# Altium PCB POT 2x8.PcbDoc
Units mil, origin at the board's own origin, x right, y up, seen from the top; angles counter-clockwise.
Board outline 6000 x 4000 mil, 4 copper layers (Top Layer, Mid Layer 1, Mid Layer 2, Bottom Layer), stack 38.189 mil thick; 76 components, 83 nets, 369 pads, 21 vias.
Unrouted connection lines stored in the file: 226.
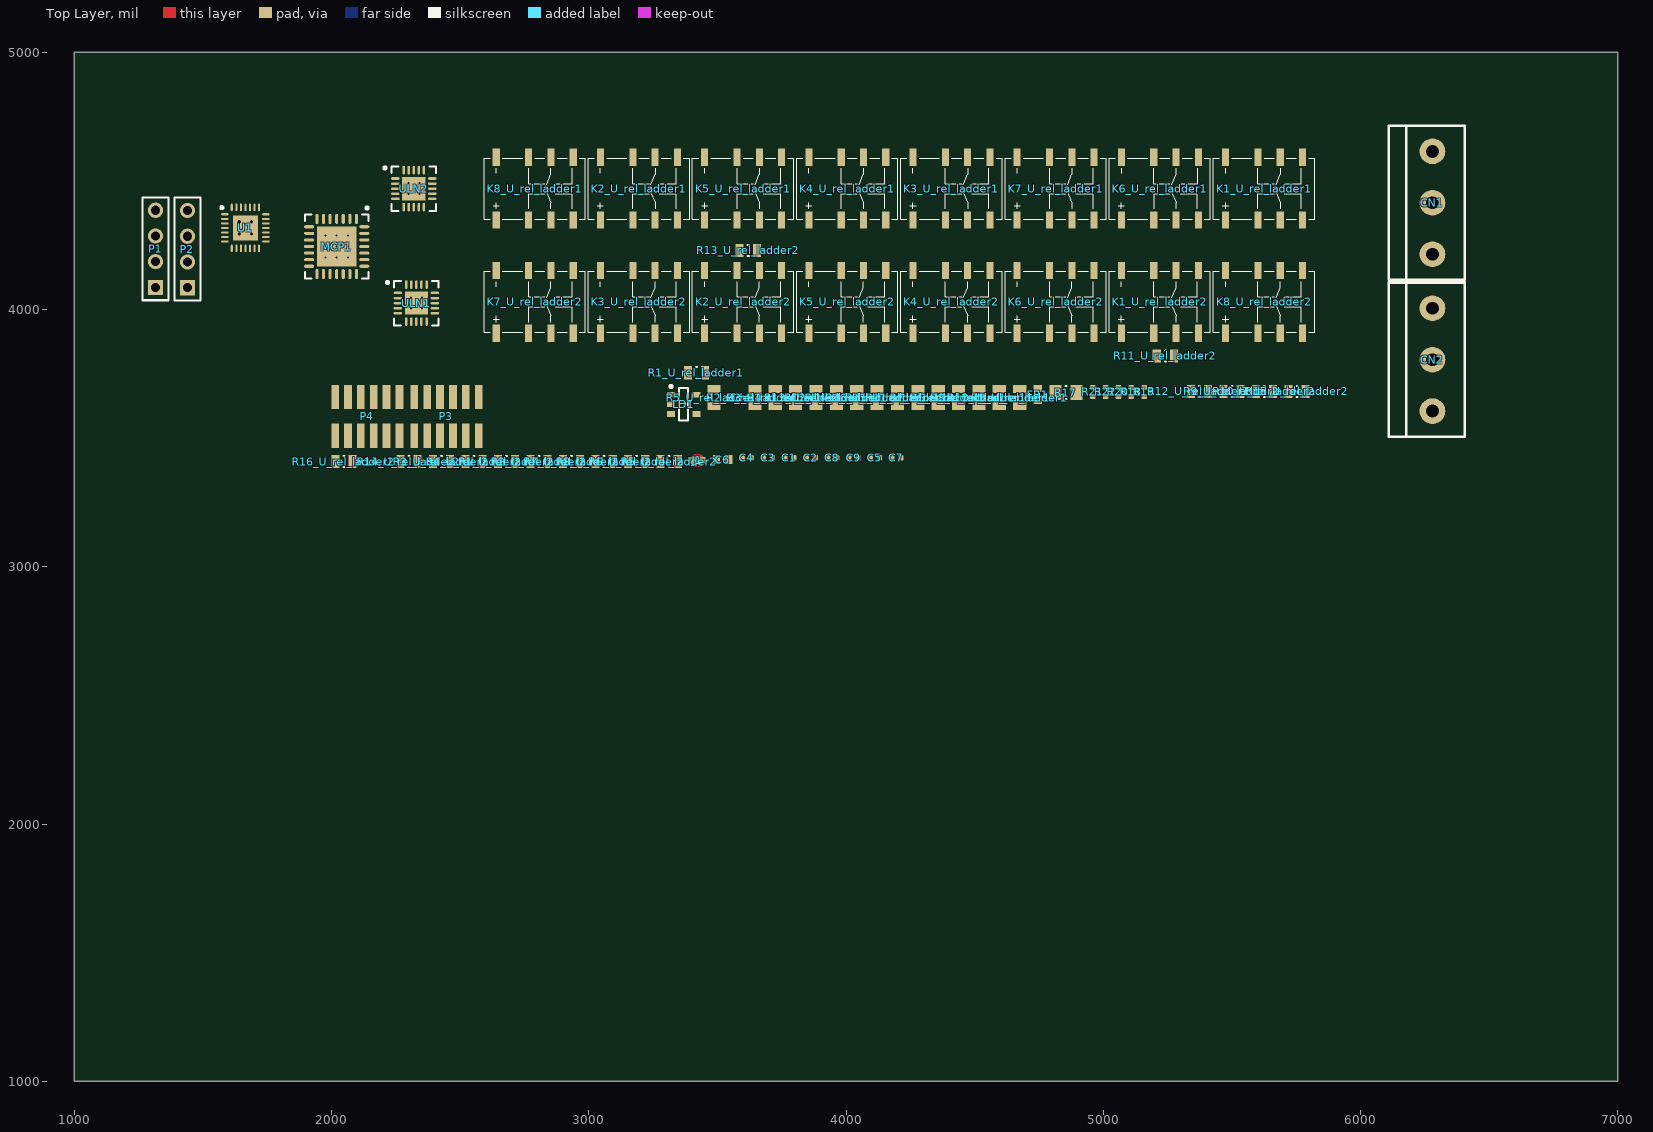
[diagram p0: Top Layer view]
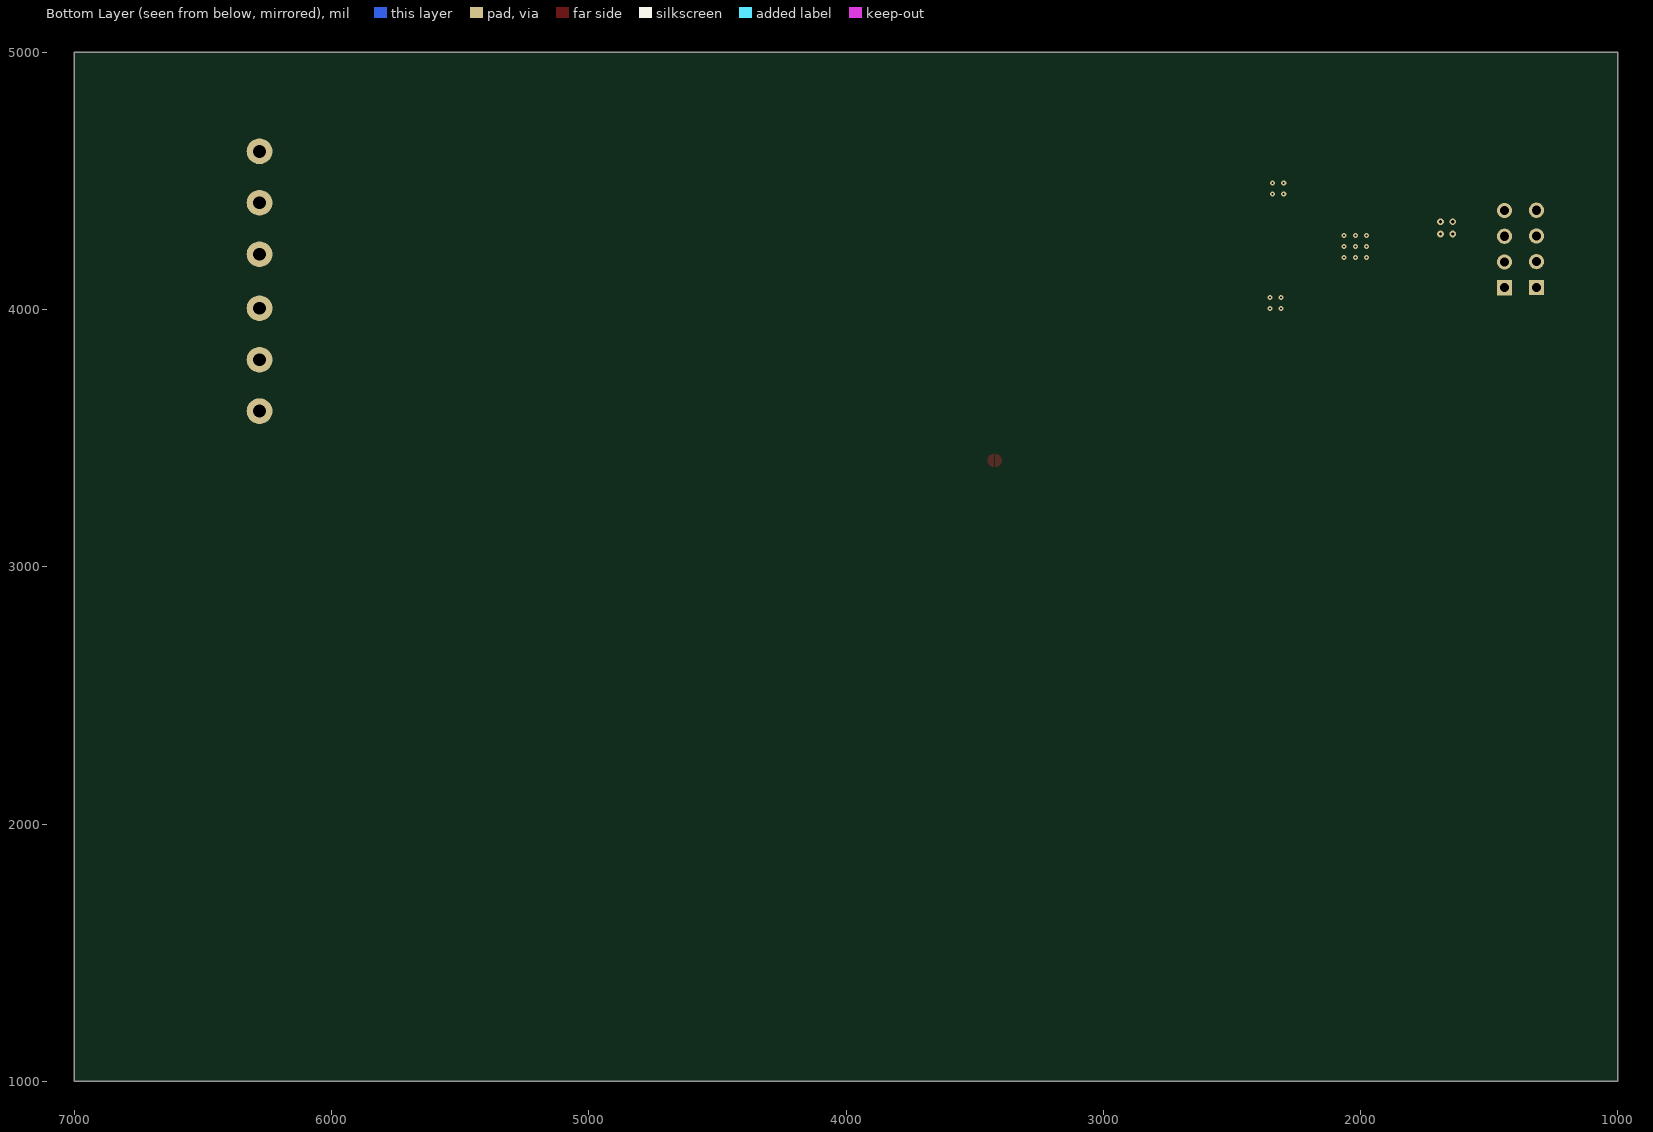
[diagram p1: Bottom Layer view, seen from below]

## Layer stack, top to bottom
Top Solder: solder mask 0.5, Solder Resist, Dk 3.8
Top Layer: signal copper 1.378
Dielectric 1: prepreg 3.937, 2313, Dk 4.05
Mid Layer 1: signal copper 0.689
Core: core 26.1811, FR-4, Dk 4.5
Mid Layer 2: signal copper 0.689
Dielectric 2: prepreg 3.937, 2313, Dk 4.05
Bottom Layer: signal copper 1.378
Bottom Solder: solder mask 0.5, Solder Resist, Dk 3.8

## Board outline
1000,1000 7000,1000 7000,5000 1000,5000

## Design rules (kind name [scope] priority, off if disabled: settings)
BoardOutlineClearance [All] p1: gap=7.87 ignorepadtopadclearanceinfootprint=FALSE
Clearance [All] p1: gap=4 ignorepadtopadclearanceinfootprint=FALSE except(5: Arc-Via Track-Via SMDPad-Via THPad-Via Via-Via Via-Fill Via-Poly Via-Region Via-Text; 9.84: Arc-Hole Track-Hole SMDPad-Hole THPad-Hole Via-Hole Fill-Hole Poly-Hole Region-Hole Text-Hole)
ComponentClearance [All] p1: gap=4 collisioncheckmode=3 verticalgap=4 showdistances=TRUE
DiffPairsRouting [All] p1: maxlimit=4 minlimit=4 mostfreqgap=4 toplayer_minwidth=4 toplayer_maxwidth=71497.94 toplayer_prefwidth=4 midlayer1_minwidth=4 midlayer1_maxwidth=71497.94 midlayer1_prefwidth=4 midlayer2_minwidth=4 midlayer2_maxwidth=71497.94 midlayer2_prefwidth=4 bottomlayer_minwidth=4 bottomlayer_maxwidth=71497.94 bottomlayer_prefwidth=4 maxuncoupledlength=500
Height [All] p1: minheight=0 maxheight=71497.94 prefheight=500
HoleSize [All] p1: absolutevalues=TRUE maxlimit=248.03 minlimit=7.87 maxpercent=80.000 minpercent=20.000
HoleToHoleClearance [All] p1: gap=9.84 allowstackedmicrovias=FALSE
MinimumAnnularRing [All] p1: minimumring=3
MinimumSolderMaskSliver [All] p1: minsoldermaskwidth=0
PlaneClearance [All] p1: clearance=4
PlaneConnect PlaneConnectPowerPads [InPadClass('PowerPads')] p1: planeconnectstyle=Direct reliefexpansion=20 reliefentries=4 reliefconductorwidth=10 reliefairgap=10
PlaneConnect [All] p2: pad.planeconnectstyle=Relief pad.reliefexpansion=11.81 pad.reliefentries=4 pad.reliefconductorwidth=4 pad.reliefairgap=4 via.planeconnectstyle=Direct via.reliefexpansion=11.81 via.reliefentries=4 via.reliefconductorwidth=5 via.reliefairgap=5
PolygonConnect PolygonConnectPowerPads [All vs (InPadClass('PowerPads'))] p1: connectstyle=Direct reliefconductorwidth=10 reliefentries=4 polygonreliefangle="90 Angle" airgapwidth=10
PolygonConnect [All] p2: thpad.connectstyle=Relief thpad.reliefconductorwidth=4 thpad.reliefentries=4 thpad.polygonreliefangle="90 Angle" thpad.airgapwidth=4 smdpad.connectstyle=Relief smdpad.reliefconductorwidth=4 smdpad.reliefentries=4 smdpad.polygonreliefangle="90 Angle" smdpad.airgapwidth=4 via.connectstyle=Direct via.reliefconductorwidth=5 via.reliefentries=4 via.polygonreliefangle="90 Angle" via.airgapwidth=5
RoutingVias [All] p1: holewidth=7.87 width=17.72 viastyle="Through Hole" minholewidth=7.87 minwidth=17.72 maxholewidth=248.03 maxwidth=257.87
SilkToSilkClearance [All] p1: silktosilkclearance=0
SilkToSolderMaskClearance [IsPad] p1: minsilkscreentomaskgap=4 clearancetoexposedcopper=TRUE
SolderMaskExpansion [All] p1: expansion=2.95 istentingtop=FALSE
Width [All] p1: maxlimit=71497.94 minlimit=4 preferedwidth=4
20 further rules are at their usual default settings.

## Classes and differential pairs
channel class rel_ladder: U_rel_ladder1 U_rel_ladder2
component class U_rel_ladder2: K1_U_rel_ladder2 K2_U_rel_ladder2 K3_U_rel_ladder2 K4_U_rel_ladder2 K5_U_rel_ladder2 K6_U_rel_ladder2 K7_U_rel_ladder2 K8_U_rel_ladder2 R1_U_rel_ladder2 R2_U_rel_ladder2 R3_U_rel_ladder2 R4_U_rel_ladder2 R5_U_rel_ladder2 R6_U_rel_ladder2 R7_U_rel_ladder2 R8_U_rel_ladder2 R9_U_rel_ladder2 R10_U_rel_ladder2 R11_U_rel_ladder2 R12_U_rel_ladder2 R13_U_rel_ladder2 R14_U_rel_ladder2 R15_U_rel_ladder2 R16_U_rel_ladder2
component class U_rel_ladder1: K1_U_rel_ladder1 K2_U_rel_ladder1 K3_U_rel_ladder1 K4_U_rel_ladder1 K5_U_rel_ladder1 K6_U_rel_ladder1 K7_U_rel_ladder1 K8_U_rel_ladder1 R1_U_rel_ladder1 R2_U_rel_ladder1 R3_U_rel_ladder1 R4_U_rel_ladder1 R5_U_rel_ladder1 R6_U_rel_ladder1 R7_U_rel_ladder1 R8_U_rel_ladder1 R9_U_rel_ladder1 R10_U_rel_ladder1 R11_U_rel_ladder1 R12_U_rel_ladder1 R13_U_rel_ladder1 R14_U_rel_ladder1 R15_U_rel_ladder1 R16_U_rel_ladder1
component class "POT 2x8": C1 C2 C3 C4 C5 C6 C7 C8 C9 CN1 CN2 FB1 J1 LD1 MCP1 P1 P2 P3 P4 R17 R18 R19 R20 R21 R22 U1 ULN1 ULN2

## Components (designator, comment, footprint, x,y, rotation, side; value= is the part's Value field where it differs from the comment)
C1 "100n" R1005_0402i_L 3780.06,3423.46 r0 top
C2 "100n" R1005_0402i_L 3863.18,3423.46 r0 top
C3 "100n" R1005_0402i_L 3696.94,3423.46 r0 top
C4 "100n" R1005_0402i_L 3613.83,3423.46 r0 top
C5 "100n" R1005_0402i_L 4112.53,3423.46 r0 top
C6 "1u" C1608_0603I_L 3520.47,3416.77 r0 top
C7 "100n" R1005_0402i_L 4195.65,3423.46 r0 top
C8 "100n" R1005_0402i_L 3946.3,3423.46 r0 top
C9 "100n" R1005_0402i_L 4029.42,3423.46 r0 top
CN1 "VRSTNA SPONKA 3P/16A" "VRSTNA SPONKA 3P/16A" 6280,4615 r270 top
CN2 "VRSTNA SPONKA 3P/16A" "VRSTNA SPONKA 3P/16A" 6280,4005 r270 top
FB1 "FERITTE BEAD" R1608_0603I_L 4745.52,3669.57 r90 top
J1 "Terminator" solderJumper 3422.18,3413.49 r0 top
K1_U_rel_ladder1 "DPDT" "AXICOM IM-G Relay" 5625,4470 r0 top (schematic designator K1)
K1_U_rel_ladder2 "DPDT" "AXICOM IM-G Relay" 5220,4030 r0 top (schematic designator K1)
K2_U_rel_ladder1 "DPDT" "AXICOM IM-G Relay" 3195,4470 r0 top (schematic designator K2)
K2_U_rel_ladder2 "DPDT" "AXICOM IM-G Relay" 3600,4030 r0 top (schematic designator K2)
K3_U_rel_ladder1 "DPDT" "AXICOM IM-G Relay" 4410,4470 r0 top (schematic designator K3)
K3_U_rel_ladder2 "DPDT" "AXICOM IM-G Relay" 3195,4030 r0 top (schematic designator K3)
K4_U_rel_ladder1 "DPDT" "AXICOM IM-G Relay" 4005,4470 r0 top (schematic designator K4)
K4_U_rel_ladder2 "DPDT" "AXICOM IM-G Relay" 4410,4030 r0 top (schematic designator K4)
K5_U_rel_ladder1 "DPDT" "AXICOM IM-G Relay" 3600,4470 r0 top (schematic designator K5)
K5_U_rel_ladder2 "DPDT" "AXICOM IM-G Relay" 4005,4030 r0 top (schematic designator K5)
K6_U_rel_ladder1 "DPDT" "AXICOM IM-G Relay" 5220,4470 r0 top (schematic designator K6)
K6_U_rel_ladder2 "DPDT" "AXICOM IM-G Relay" 4815,4030 r0 top (schematic designator K6)
K7_U_rel_ladder1 "DPDT" "AXICOM IM-G Relay" 4815,4470 r0 top (schematic designator K7)
K7_U_rel_ladder2 "DPDT" "AXICOM IM-G Relay" 2790,4030 r0 top (schematic designator K7)
K8_U_rel_ladder1 "DPDT" "AXICOM IM-G Relay" 2790,4470 r0 top (schematic designator K8)
K8_U_rel_ladder2 "DPDT" "AXICOM IM-G Relay" 5625,4030 r0 top (schematic designator K8)
LD1 "NCP115 3.3V" TSOP95P280X110-6L 3368.93,3631.25 r0 top
MCP1 "MCP32017" "MCP23017 QFN" 2020,4245 r270 top
P1 "PWR" HDR1X4 1315.94,4086.06 r90 top
P2 "PWR" HDR1X4 1440,4085 r90 top
P3 "Input" "1.27mm SMD conn" 2446.88,3584.73 r0 top
P4 "Output" "1.27mm SMD conn" 2138.96,3584.73 r0 top
R1_U_rel_ladder1 "R/2" R2012_0805I_L 3418.74,3754.52 r180 top (schematic designator R1)
R1_U_rel_ladder2 "R/2" R2012_0805I_L 2680.34,3408.9 r0 top (schematic designator R1)
R2_U_rel_ladder1 "R/2" R2012_0805I_L 3645.84,3657.76 r90 top (schematic designator R2)
R2_U_rel_ladder2 "R/2" R2012_0805I_L 2806.76,3408.9 r0 top (schematic designator R2)
R3_U_rel_ladder1 "R/4" R2012_0805I_L 3725.02,3657.76 r90 top (schematic designator R3)
R3_U_rel_ladder2 "R/4" R2012_0805I_L 2427.49,3408.9 r0 top (schematic designator R3)
R4_U_rel_ladder1 "R/4" R2012_0805I_L 3804.2,3657.76 r90 top (schematic designator R4)
R4_U_rel_ladder2 "R/4" R2012_0805I_L 2553.91,3408.9 r0 top (schematic designator R4)
R5_U_rel_ladder1 "R/8" R2012_0805I_L 3487.48,3657.76 r90 top (schematic designator R5)
R5_U_rel_ladder2 "R/8" R2012_0805I_L 3312.46,3408.9 r0 top (schematic designator R5)
R6_U_rel_ladder1 "R/8" R2012_0805I_L 4437.65,3657.76 r90 top (schematic designator R6)
R6_U_rel_ladder2 "R/8" R2012_0805I_L 3186.04,3408.9 r0 top (schematic designator R6)
R7_U_rel_ladder1 "R/16" R2012_0805I_L 4358.47,3657.76 r90 top (schematic designator R7)
R7_U_rel_ladder2 "R/16" R2012_0805I_L 2933.19,3408.9 r0 top (schematic designator R7)
R8_U_rel_ladder1 "R/16" R2012_0805I_L 4516.83,3657.76 r90 top (schematic designator R8)
R8_U_rel_ladder2 "R/16" R2012_0805I_L 3059.61,3408.9 r0 top (schematic designator R8)
R9_U_rel_ladder1 "R/32" R2012_0805I_L 4675.2,3657.76 r90 top (schematic designator R9)
R9_U_rel_ladder2 "R/32" R2012_0805I_L 5500.47,3681.39 r0 top (schematic designator R9)
R10_U_rel_ladder1 "R/32" R2012_0805I_L 4596.01,3657.76 r90 top (schematic designator R10)
R10_U_rel_ladder2 "R/32" R2012_0805I_L 5626.9,3681.39 r0 top (schematic designator R10)
R11_U_rel_ladder1 "R/64" R2012_0805I_L 4279.29,3657.76 r90 top (schematic designator R11)
R11_U_rel_ladder2 "R/64" R2012_0805I_L 5241.54,3820 r0 top (schematic designator R11)
R12_U_rel_ladder1 "R/64" R2012_0805I_L 3962.57,3657.76 r90 top (schematic designator R12)
R12_U_rel_ladder2 "R/64" R2012_0805I_L 5374.05,3681.39 r0 top (schematic designator R12)
R13_U_rel_ladder1 "R/128" R2012_0805I_L 3883.39,3657.76 r90 top (schematic designator R13)
R13_U_rel_ladder2 "R/128" R2012_0805I_L 3620,4230 r180 top (schematic designator R13)
R14_U_rel_ladder1 "R/128" R2012_0805I_L 4041.75,3657.76 r90 top (schematic designator R14)
R14_U_rel_ladder2 "R/128" R2012_0805I_L 2301.06,3408.9 r0 top (schematic designator R14)
R15_U_rel_ladder1 "R/256" R2012_0805I_L 4200.11,3657.76 r90 top (schematic designator R15)
R15_U_rel_ladder2 "R/256" R2012_0805I_L 5753.32,3681.39 r0 top (schematic designator R15)
R16_U_rel_ladder1 "R/256" R2012_0805I_L 4120.93,3657.76 r90 top (schematic designator R16)
R16_U_rel_ladder2 "R/256" R2012_0805I_L 2048.21,3408.9 r0 top (schematic designator R16)
R17 "100k" R2012_0805I_M 4855.21,3677.45 r0 top
R18 "500" R1005_0402i_L 5109.34,3679.42 r90 top
R19 "100k" R1005_0402i_L 5159.38,3679.42 r90 top
R20 "100k" R1005_0402i_L 5059.29,3679.42 r90 top
R21 "10k" R1005_0402i_L 4959.2,3679.42 r90 top
R22 "10k" R1005_0402i_L 5009.24,3679.42 r90 top
U1 "ATtiny88-MMU" 28M1_N 1665.28,4317.28 r0 top
ULN1 "ULN2803" QFN127P600-8N 2330,4025 r0 top
ULN2 "ULN2803" QFN127P600-8N 2320,4470 r0 top

## Footprints (in the part's own frame and the unit in brackets; to place one, negate y for a bottom-side part, rotate by r counter-clockwise, add the part's x,y. Pads: shape width x height; smd on the part's side, far side on the other; paste and mask are expansions set on the pad)
"1.27mm SMD conn" [mm]
  rect 0.76x2.4 smd: 1(3.175,1.905) 2(3.175,-1.905) 3(1.905,1.905) 4(1.905,-1.905) 5(0.635,1.905) 6(0.635,-1.905) 7(-0.635,1.905) 8(-0.635,-1.905) 9(-1.905,1.905) 10(-1.905,-1.905) 11(-3.175,1.905) 12(-3.175,-1.905)
28M1_N [mm]
  oval 0.75x0.2 smd: 1(-2.025,1.35) 2(-2.025,0.9) 3(-2.025,0.45) 4(-2.025,0) 5(-2.025,-0.45) 6(-2.025,-0.9) 7(-2.025,-1.35) 15(2.025,-1.35) 16(2.025,-0.9) 17(2.025,-0.45) 18(2.025,0) 19(2.025,0.45) 20(2.025,0.9) 21(2.025,1.35)
  oval 0.2x0.75 smd: 8(-1.35,-2.025) 9(-0.9,-2.025) 10(-0.45,-2.025) 11(0,-2.025) 12(0.45,-2.025) 13(0.9,-2.025) 14(1.35,-2.025) 22(1.35,2.025) 23(0.9,2.025) 24(0.45,2.025) 25(0,2.025) 26(-0.45,2.025) 27(-0.9,2.025) 28(-1.35,2.025)
  rect 2.5x2.5 smd: 29(0,0)
  silkscreen extent -2.45,1.88 -2.2,2.12, body extent -2.02,-2.02 2.02,2.02, height 1
"AXICOM IM-G Relay" [mm] "TE CONNECTIVITY AXICOM IM-G (Gull wings) Relay SMD"
  rect 0.7x1.7 smd: 1(-3.8,-3.1) 2(-0.6,-3.1) 3(1.6,-3.1) 4(3.8,-3.1) 5(3.8,3.1) 6(1.6,3.1) 7(-0.6,3.1) 8(-3.8,3.1)
  silkscreen extent -5,-3 5,3
C1608_0603I_L [mm] "Chip Capacitor, 2-Leads, Body 1.57x0.85mm, IPC High Density"
  rect 0.72x0.9 smd: 1(-0.6,0) 2(0.6,0)
  body extent -0.82,-0.48 0.82,0.48, height 0.95
HDR1X4 [mm] "Connector; Header; 4 Position"
  rect 1.5x1.5 hole 0.9: 1(0,0)
  round 1.5 hole 0.9: 2(2.54,0) 3(5.08,0) 4(7.62,0)
  silkscreen extent -1.27,-1.27 8.89,1.27
"MCP23017 QFN" [mm] "QFN, 28-Leads, Body 6,00x6,00mm, Pitch 0,65mm, Thermal Pad 3,93x3,93mm, IPC High Density"
  oval 1x0.3 smd: 1(-2.725,1.95) 2(-2.725,1.3) 3(-2.725,0.65) 4(-2.725,0) 5(-2.725,-0.65) 6(-2.725,-1.3) 7(-2.725,-1.95) 15(2.725,-1.95) 16(2.725,-1.3) 17(2.725,-0.65) 18(2.725,0) 19(2.725,0.65) 20(2.725,1.3) 21(2.725,1.95)
  oval 0.3x1 smd: 8(-1.95,-2.725) 9(-1.3,-2.725) 10(-0.65,-2.725) 11(0,-2.725) 12(0.65,-2.725) 13(1.3,-2.725) 14(1.95,-2.725) 22(1.95,2.725) 23(1.3,2.725) 24(0.65,2.725) 25(0,2.725) 26(-0.65,2.725) 27(-1.3,2.725) 28(-1.95,2.725)
  rect 3.93x3.93 smd: 29(0,0)
  silkscreen extent -3.92,-3.15 3.15,3.15, body extent -3,-3 3,3, height 0.9
QFN127P600-8N [mm]
  oval 0.85x0.25 smd: 1(-1.825,1) 2(-1.825,0.5) 3(-1.825,0) 4(-1.825,-0.5) 5(-1.825,-1) 11(1.825,-1) 12(1.825,-0.5) 13(1.825,0) 14(1.825,0.5) 15(1.825,1)
  oval 0.25x0.85 smd: 6(-1,-1.825) 7(-0.5,-1.825) 8(0,-1.825) 9(0.5,-1.825) 10(1,-1.825) 16(1,1.825) 17(0.5,1.825) 18(0,1.825) 19(-0.5,1.825) 20(-1,1.825)
  rect 2.3x2.3 smd: 21(0,0)
  silkscreen extent -2.97,-2.2 2.2,2.2, body extent -2.05,-2.05 2.05,2.05, height 0.8
R1005_0402i_L [mm] "Resistor, Chip; 1.00 mm L X 0.50 mm W X 0.40 mm H body"
  rrect50% 0.52x0.56 smd: 1(-0.44,0) 2(0.44,0)
  body extent -0.5,-0.25 0.5,0.25, height 0.4
R1608_0603I_L [mm] "Chip Resistor, 2-Leads, Body 1.57x0.85mm, IPC High Density"
  rect 0.7x0.85 smd: 1(-0.6,0) 2(0.6,0)
  body extent -0.82,-0.48 0.82,0.48, height 0.5
R2012_0805I_L [mm] "Chip Resistor, 2-Leads, Body 2.05x1.25mm, IPC High Density"
  rect 0.8x1.3 smd: 1(-0.85,0) 2(0.85,0)
  silkscreen extent -0.05,-0.55 0.05,0.55, body extent -1.1,-0.7 1.1,0.7, height 0.8
R2012_0805I_M [mm] "Chip Resistor, 2-Leads, Body 2.05x1.25mm, IPC Low Density"
  rrect15% 1.2x1.5 smd: 1(-1.05,0) 2(1.05,0)
  silkscreen extent -0.05,-0.65 0.05,0.65, body extent -1.1,-0.7 1.1,0.7, height 0.8
solderJumper [mil]
  rect 25x25 smd: 1(20,0) 2(-20,0)
  Top Layer region: 2.51,25 12.08,23.1 20.19,17.68 25.61,9.57 27.51,0 27.51,0 25.61,-9.57 20.19,-17.68 12.08,-23.1 2.51,-25 2.51,-25
  Top Layer region: -2.51,25 -12.08,23.1 -20.19,17.68 -25.61,9.57 -27.51,0 -27.51,0 -25.61,-9.57 -20.19,-17.68 -12.08,-23.1 -2.51,-25 -2.51,-25
TSOP95P280X110-6L [mm]
  rect 0.8x0.55 smd: 1(-1.25,0.95) 2(-1.25,0) 3(-1.25,-0.95) 4(1.25,-0.95) 5(1.25,0.95)
  silkscreen extent -1.37,-1.6 0.45,1.9, body extent -1.38,-1.6 1.38,1.6, height 1.1
"VRSTNA SPONKA 3P/16A" [mil]
  round 100 hole 50: 1(0,0) 2(200,0) 3(400,0)
  silkscreen extent -100,-170 500,126, body extent -100,-170 500,125, height 394

## Part data
C1 C2 C3 C4 C5 C6 C7 C8 C9: library part C, "Capacitor"
J1: library part JMP_mini
K1_U_rel_ladder1 K1_U_rel_ladder2 K2_U_rel_ladder1 K2_U_rel_ladder2 K3_U_rel_ladder1 K3_U_rel_ladder2 K4_U_rel_ladder1 K4_U_rel_ladder2 K5_U_rel_ladder1 K5_U_rel_ladder2 K6_U_rel_ladder1 K6_U_rel_ladder2 K7_U_rel_ladder1 K7_U_rel_ladder2 K8_U_rel_ladder1 K8_U_rel_ladder2: library part "IM-GR Relay DPDT", "TE CONNECTIVITY  IM-GR  RELAY, DPDT, NO", Farnell ID=1175070, URL=http://si.farnell.com/te-connectivity-axicom/im06gr/relay-gull-wing-dpco-12vdc-2a/dp/1175070
P1 P2: library part "Header 4", "Header, 4-Pin", LatestRevisionDate=17-Jul-2002, LatestRevisionNote="Re-released for DXP Platform.", Publisher="Altium Limited"
P3 P4: library part "Header 6X2", "Header, 6-Pin, Dual row", LatestRevisionDate=17-Jul-2002, LatestRevisionNote="Re-released for DXP Platform.", Publisher="Altium Limited"
R1_U_rel_ladder1 R1_U_rel_ladder2 R2_U_rel_ladder1 R2_U_rel_ladder2 R3_U_rel_ladder1 R3_U_rel_ladder2 R4_U_rel_ladder1 R4_U_rel_ladder2 R5_U_rel_ladder1 R5_U_rel_ladder2 R6_U_rel_ladder1 R6_U_rel_ladder2 R7_U_rel_ladder1 R7_U_rel_ladder2 R8_U_rel_ladder1 R8_U_rel_ladder2 R9_U_rel_ladder1 R9_U_rel_ladder2 R10_U_rel_ladder1 R10_U_rel_ladder2 R11_U_rel_ladder1 R11_U_rel_ladder2 R12_U_rel_ladder1 R12_U_rel_ladder2 R13_U_rel_ladder1 R13_U_rel_ladder2 R14_U_rel_ladder1 R14_U_rel_ladder2 R15_U_rel_ladder1 R15_U_rel_ladder2 R16_U_rel_ladder1 R16_U_rel_ladder2 R17 R18 R19 R20 R21 R22: library part R, "R"
U1: "8-bit AVR Microcontroller, 1.8-5.5V, 8KB Flash, 64 Bytes EEPROM, 512 Bytes SRAM, 28-pin MLF, Industrial Grade (-40°C to 85°C), Pb-Free", Supplier Part Number 1=ATTINY88-MMU-ND, ComponentLink1Description="Manufacturer Link", ComponentLink1URL=http://www.atmel.com/products/avr/default.asp?, ComponentLink2Description="ATtiny48/88 Datasheet", ComponentLink2URL=http://www.atmel.com/dyn/resources/prod_documents/doc8008.pdf, ComponentLink3Description="ATtiny48/88 Summary", ComponentLink3URL=http://www.atmel.com/dyn/resources/prod_documents/8008S.pdf, ComponentLink4Description="Atmel.com Home", ComponentLink4URL=http://www.atmel.com, DatasheetVersion="revC, Mar-2009", PackageDescription="28-pad, 4x4x1.0mm Body, Pitch 0.45mm, 2.4x2.4mm Exposed Pad, Plastic Very Thin QFN Package (VQFN)", PackageReference=28M1, PackageVersion="revB, Nov-2008", Published=1-Apr-2010, Publisher="Altium Limited", Supplier 1=Digi-Key, Supplier 2=Mouser, Supplier Part Number 2=556-ATTINY88-MMU

## Via types
v1: diameter 19.68, hole 7.87, Top Layer to Bottom Layer, 17 vias
v2: diameter 25.98, hole 12.99, Top Layer to Bottom Layer, 4 vias

## Nets (pads, with @x,y where several pads share a name; then routed paths per layer and width w, separated by ;. In a path a pad name is that pad's centre, name@x,y a point inside that pad or via, vN(x,y) a via of type N, cw(c..) or ccw(c..) an arc to the next point about the centre after c; other vN are vias at no path point)
+3.3V: C1.2 C6.1 C7.1 C8.1 FB1.1 LD1.5 MCP1.5 R17.1 R19.1 R20.1 R21.1 R22.1 U1.3
+5: C5.1 LD1.1 LD1.3 P1.2 P2.2
+12: C2.1 C4.1 K1_U_rel_ladder1.1 K1_U_rel_ladder2.1 K2_U_rel_ladder1.1 K2_U_rel_ladder2.1 K3_U_rel_ladder1.1 K3_U_rel_ladder2.1 K4_U_rel_ladder1.1 K4_U_rel_ladder2.1 K5_U_rel_ladder1.1 K5_U_rel_ladder2.1 K6_U_rel_ladder1.1 K6_U_rel_ladder2.1 K7_U_rel_ladder1.1 K7_U_rel_ladder2.1 K8_U_rel_ladder1.1 K8_U_rel_ladder2.1 P1.3 P2.3 ULN1.9 ULN2.9
A1: CN1.1 K8_U_rel_ladder1.6 R1_U_rel_ladder1.1
A2: CN2.1 K8_U_rel_ladder2.6 R1_U_rel_ladder2.1
AVCC: C9.1 FB1.2 U1.16
B1: CN1.2 K1_U_rel_ladder1.3 K1_U_rel_ladder1.7 R15_U_rel_ladder1.2 R16_U_rel_ladder1.2
B2: CN2.2 K1_U_rel_ladder2.3 K1_U_rel_ladder2.7 R15_U_rel_ladder2.2 R16_U_rel_ladder2.2
C1: CN1.3 K8_U_rel_ladder1.4 R2_U_rel_ladder1.1
C2: CN2.3 K8_U_rel_ladder2.4 R2_U_rel_ladder2.1
GND: C1.1 C3.1 C5.2 C6.2 C7.2 C8.2 C9.2 LD1.2 MCP1.6 MCP1.11 MCP1.12 MCP1.13 P1.1 P1.4 P2.1 P2.4 P3.1 P3.3 P3.5 P3.7 P3.9 P3.11 P4.1 P4.3 P4.5 P4.7 P4.9 P4.11 U1.4 U1.18 U1.29
  other v2: 1641.65,4293.66 1688.9,4293.66 1641.65,4340.91 1688.9,4340.91
INT: P3.12 P4.12 R18.1 R20.2
MISO: J1.2 P3.2 P4.2
MISO_T88: J1.1 P4.4 U1.14
MOSI_T88: P3.4 U1.13
NetC3_2: C3.2 MCP1.14 R17.2
NetK1_U_rel_ladder1_4: K1_U_rel_ladder1.4 K2_U_rel_ladder1.3 R14_U_rel_ladder1.2 R16_U_rel_ladder1.1
NetK1_U_rel_ladder1_6: K1_U_rel_ladder1.6 K2_U_rel_ladder1.7 R13_U_rel_ladder1.2 R15_U_rel_ladder1.1
NetK1_U_rel_ladder1_8: K1_U_rel_ladder1.8 ULN1.17
NetK1_U_rel_ladder2_4: K1_U_rel_ladder2.4 K2_U_rel_ladder2.3 R14_U_rel_ladder2.2 R16_U_rel_ladder2.1
NetK1_U_rel_ladder2_6: K1_U_rel_ladder2.6 K2_U_rel_ladder2.7 R13_U_rel_ladder2.2 R15_U_rel_ladder2.1
NetK1_U_rel_ladder2_8: K1_U_rel_ladder2.8 ULN2.17
NetK2_U_rel_ladder1_4: K2_U_rel_ladder1.4 K3_U_rel_ladder1.3 R12_U_rel_ladder1.2 R14_U_rel_ladder1.1
NetK2_U_rel_ladder1_6: K2_U_rel_ladder1.6 K3_U_rel_ladder1.7 R11_U_rel_ladder1.2 R13_U_rel_ladder1.1
NetK2_U_rel_ladder1_8: K2_U_rel_ladder1.8 ULN1.16
NetK2_U_rel_ladder2_4: K2_U_rel_ladder2.4 K3_U_rel_ladder2.3 R12_U_rel_ladder2.2 R14_U_rel_ladder2.1
NetK2_U_rel_ladder2_6: K2_U_rel_ladder2.6 K3_U_rel_ladder2.7 R11_U_rel_ladder2.2 R13_U_rel_ladder2.1
NetK2_U_rel_ladder2_8: K2_U_rel_ladder2.8 ULN2.16
NetK3_U_rel_ladder1_4: K3_U_rel_ladder1.4 K4_U_rel_ladder1.3 R10_U_rel_ladder1.2 R12_U_rel_ladder1.1
NetK3_U_rel_ladder1_6: K3_U_rel_ladder1.6 K4_U_rel_ladder1.7 R9_U_rel_ladder1.2 R11_U_rel_ladder1.1
NetK3_U_rel_ladder1_8: K3_U_rel_ladder1.8 ULN1.15
NetK3_U_rel_ladder2_4: K3_U_rel_ladder2.4 K4_U_rel_ladder2.3 R10_U_rel_ladder2.2 R12_U_rel_ladder2.1
NetK3_U_rel_ladder2_6: K3_U_rel_ladder2.6 K4_U_rel_ladder2.7 R9_U_rel_ladder2.2 R11_U_rel_ladder2.1
NetK3_U_rel_ladder2_8: K3_U_rel_ladder2.8 ULN2.15
NetK4_U_rel_ladder1_4: K4_U_rel_ladder1.4 K5_U_rel_ladder1.3 R8_U_rel_ladder1.2 R10_U_rel_ladder1.1
NetK4_U_rel_ladder1_6: K4_U_rel_ladder1.6 K5_U_rel_ladder1.7 R7_U_rel_ladder1.2 R9_U_rel_ladder1.1
NetK4_U_rel_ladder1_8: K4_U_rel_ladder1.8 ULN1.14
NetK4_U_rel_ladder2_4: K4_U_rel_ladder2.4 K5_U_rel_ladder2.3 R8_U_rel_ladder2.2 R10_U_rel_ladder2.1
NetK4_U_rel_ladder2_6: K4_U_rel_ladder2.6 K5_U_rel_ladder2.7 R7_U_rel_ladder2.2 R9_U_rel_ladder2.1
NetK4_U_rel_ladder2_8: K4_U_rel_ladder2.8 ULN2.14
NetK5_U_rel_ladder1_4: K5_U_rel_ladder1.4 K6_U_rel_ladder1.3 R6_U_rel_ladder1.2 R8_U_rel_ladder1.1
NetK5_U_rel_ladder1_6: K5_U_rel_ladder1.6 K6_U_rel_ladder1.7 R5_U_rel_ladder1.2 R7_U_rel_ladder1.1
NetK5_U_rel_ladder1_8: K5_U_rel_ladder1.8 ULN1.13
NetK5_U_rel_ladder2_4: K5_U_rel_ladder2.4 K6_U_rel_ladder2.3 R6_U_rel_ladder2.2 R8_U_rel_ladder2.1
NetK5_U_rel_ladder2_6: K5_U_rel_ladder2.6 K6_U_rel_ladder2.7 R5_U_rel_ladder2.2 R7_U_rel_ladder2.1
NetK5_U_rel_ladder2_8: K5_U_rel_ladder2.8 ULN2.13
NetK6_U_rel_ladder1_4: K6_U_rel_ladder1.4 K7_U_rel_ladder1.3 R4_U_rel_ladder1.2 R6_U_rel_ladder1.1
NetK6_U_rel_ladder1_6: K6_U_rel_ladder1.6 K7_U_rel_ladder1.7 R3_U_rel_ladder1.2 R5_U_rel_ladder1.1
NetK6_U_rel_ladder1_8: K6_U_rel_ladder1.8 ULN1.12
NetK6_U_rel_ladder2_4: K6_U_rel_ladder2.4 K7_U_rel_ladder2.3 R4_U_rel_ladder2.2 R6_U_rel_ladder2.1
NetK6_U_rel_ladder2_6: K6_U_rel_ladder2.6 K7_U_rel_ladder2.7 R3_U_rel_ladder2.2 R5_U_rel_ladder2.1
NetK6_U_rel_ladder2_8: K6_U_rel_ladder2.8 ULN2.12
NetK7_U_rel_ladder1_4: K7_U_rel_ladder1.4 K8_U_rel_ladder1.3 R2_U_rel_ladder1.2 R4_U_rel_ladder1.1
NetK7_U_rel_ladder1_6: K7_U_rel_ladder1.6 K8_U_rel_ladder1.7 R1_U_rel_ladder1.2 R3_U_rel_ladder1.1
NetK7_U_rel_ladder1_8: K7_U_rel_ladder1.8 ULN1.11
NetK7_U_rel_ladder2_4: K7_U_rel_ladder2.4 K8_U_rel_ladder2.3 R2_U_rel_ladder2.2 R4_U_rel_ladder2.1
NetK7_U_rel_ladder2_6: K7_U_rel_ladder2.6 K8_U_rel_ladder2.7 R1_U_rel_ladder2.2 R3_U_rel_ladder2.1
NetK7_U_rel_ladder2_8: K7_U_rel_ladder2.8 ULN2.11
NetK8_U_rel_ladder1_8: K8_U_rel_ladder1.8 ULN1.10
NetK8_U_rel_ladder2_8: K8_U_rel_ladder2.8 ULN2.10
NetMCP1_1: MCP1.1 ULN2.2
NetMCP1_2: MCP1.2 ULN2.1
NetMCP1_3: MCP1.3 ULN2.20
NetMCP1_4: MCP1.4 ULN2.19
NetMCP1_17: MCP1.17 ULN1.6
NetMCP1_18: MCP1.18 ULN1.5
NetMCP1_19: MCP1.19 ULN1.4
NetMCP1_20: MCP1.20 ULN1.3
NetMCP1_21: MCP1.21 ULN1.2
NetMCP1_22: MCP1.22 ULN1.1
NetMCP1_23: MCP1.23 ULN1.20
NetMCP1_24: MCP1.24 ULN1.19
NetMCP1_25: MCP1.25 ULN2.6
NetMCP1_26: MCP1.26 ULN2.5
NetMCP1_27: MCP1.27 ULN2.4
NetMCP1_28: MCP1.28 ULN2.3
NetR18_2: R18.2 U1.6
R\E\S\E\T\: P3.10 P4.10 R19.2 U1.25
RGND: C2.2 C4.2 ULN1.8 ULN2.8
S\S\: P3.8 P4.8 U1.12
SCK: P3.6 P4.6 U1.15
SCL: MCP1.8 R22.2 U1.24
SDA: MCP1.9 R21.2 U1.23
pads on no net: K1_U_rel_ladder1.2 K1_U_rel_ladder1.5 K1_U_rel_ladder2.2 K1_U_rel_ladder2.5 K2_U_rel_ladder1.2 K2_U_rel_ladder1.5 K2_U_rel_ladder2.2 K2_U_rel_ladder2.5 K3_U_rel_ladder1.2 K3_U_rel_ladder1.5 K3_U_rel_ladder2.2 K3_U_rel_ladder2.5 K4_U_rel_ladder1.2 K4_U_rel_ladder1.5 K4_U_rel_ladder2.2 K4_U_rel_ladder2.5 K5_U_rel_ladder1.2 K5_U_rel_ladder1.5 K5_U_rel_ladder2.2 K5_U_rel_ladder2.5 K6_U_rel_ladder1.2 K6_U_rel_ladder1.5 K6_U_rel_ladder2.2 K6_U_rel_ladder2.5 K7_U_rel_ladder1.2 K7_U_rel_ladder1.5 K7_U_rel_ladder2.2 K7_U_rel_ladder2.5 K8_U_rel_ladder1.2 K8_U_rel_ladder1.5 K8_U_rel_ladder2.2 K8_U_rel_ladder2.5 LD1.4 MCP1.7 MCP1.10 MCP1.15 MCP1.16 MCP1.29 U1.1 U1.2 U1.5 U1.7 U1.8 U1.9 U1.10 U1.11 U1.17 U1.19 U1.20 U1.21 U1.22 U1.26 U1.27 U1.28 ULN1.7 ULN1.18 ULN1.21 ULN2.7 ULN2.18 ULN2.21
copper on no net:
  other v1: 2308.35,4003.35 2351.65,4003.35 2308.35,4046.65 2351.65,4046.65 1976.69,4201.69 2020,4201.69 2063.31,4201.69 1976.69,4245 2020,4245 2063.31,4245 1976.69,4288.31 2020,4288.31 2063.31,4288.31 2298.35,4448.35 2341.65,4448.35 2298.35,4491.65 2341.65,4491.65